# Altium PCB PCB_RelayBoard.PcbDoc
Units mil, origin at the board's own origin, x right, y up, seen from the top; angles counter-clockwise.
Board outline 2559 x 1299.21 mil, 2 copper layers (Top Layer, Bottom Layer); 13 components, 134 nets, 70 pads, 1 vias.
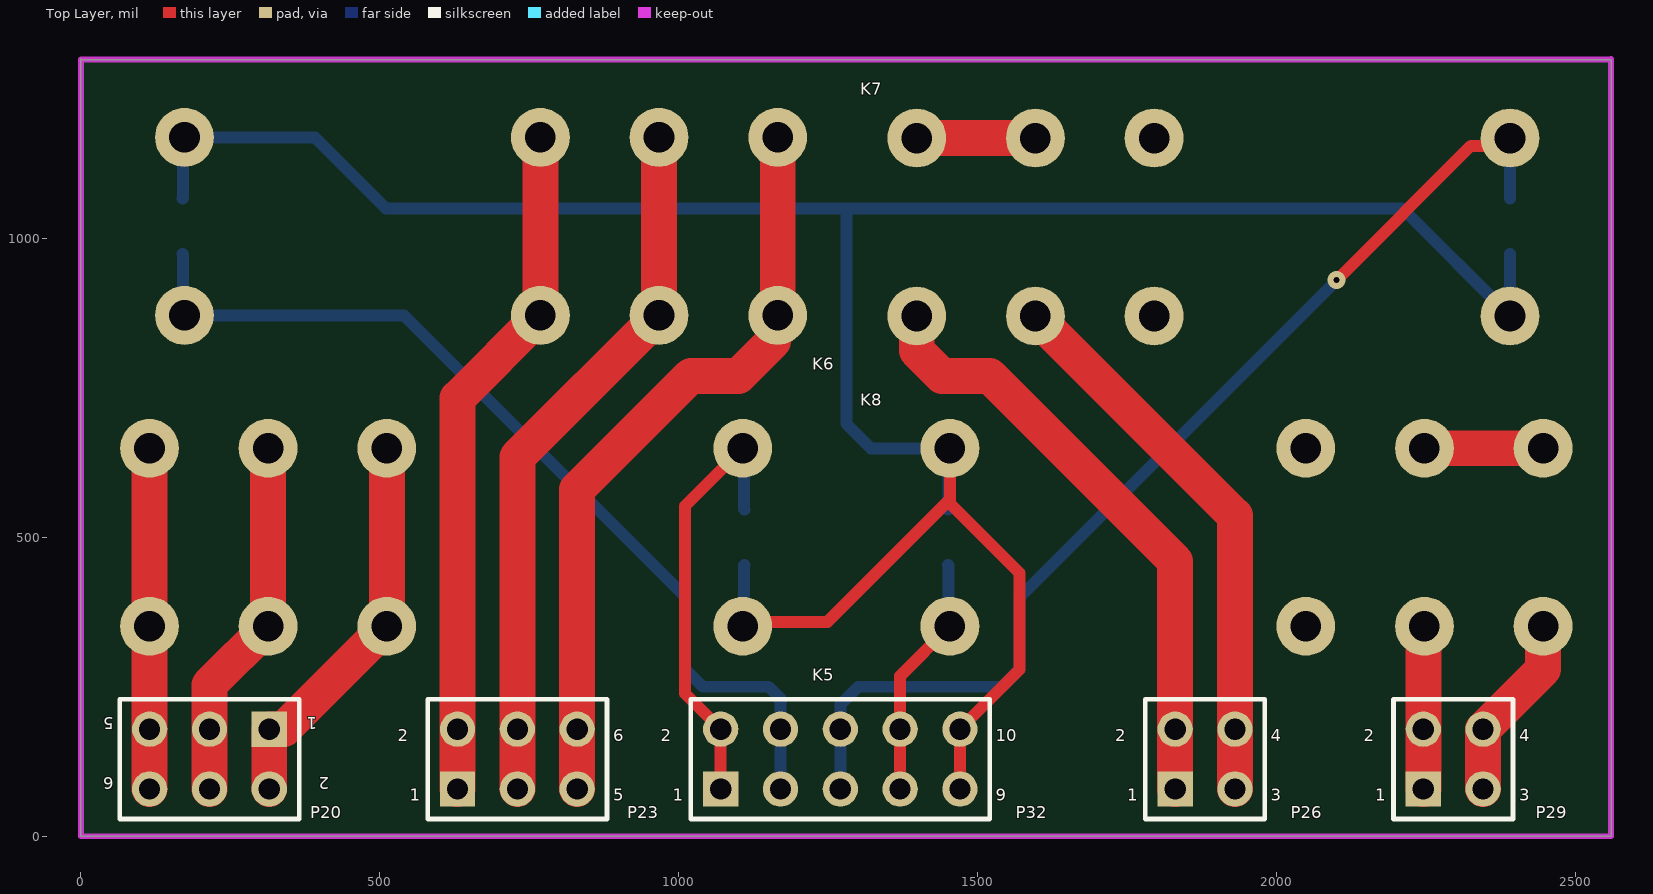
[diagram p0: Top Layer view]
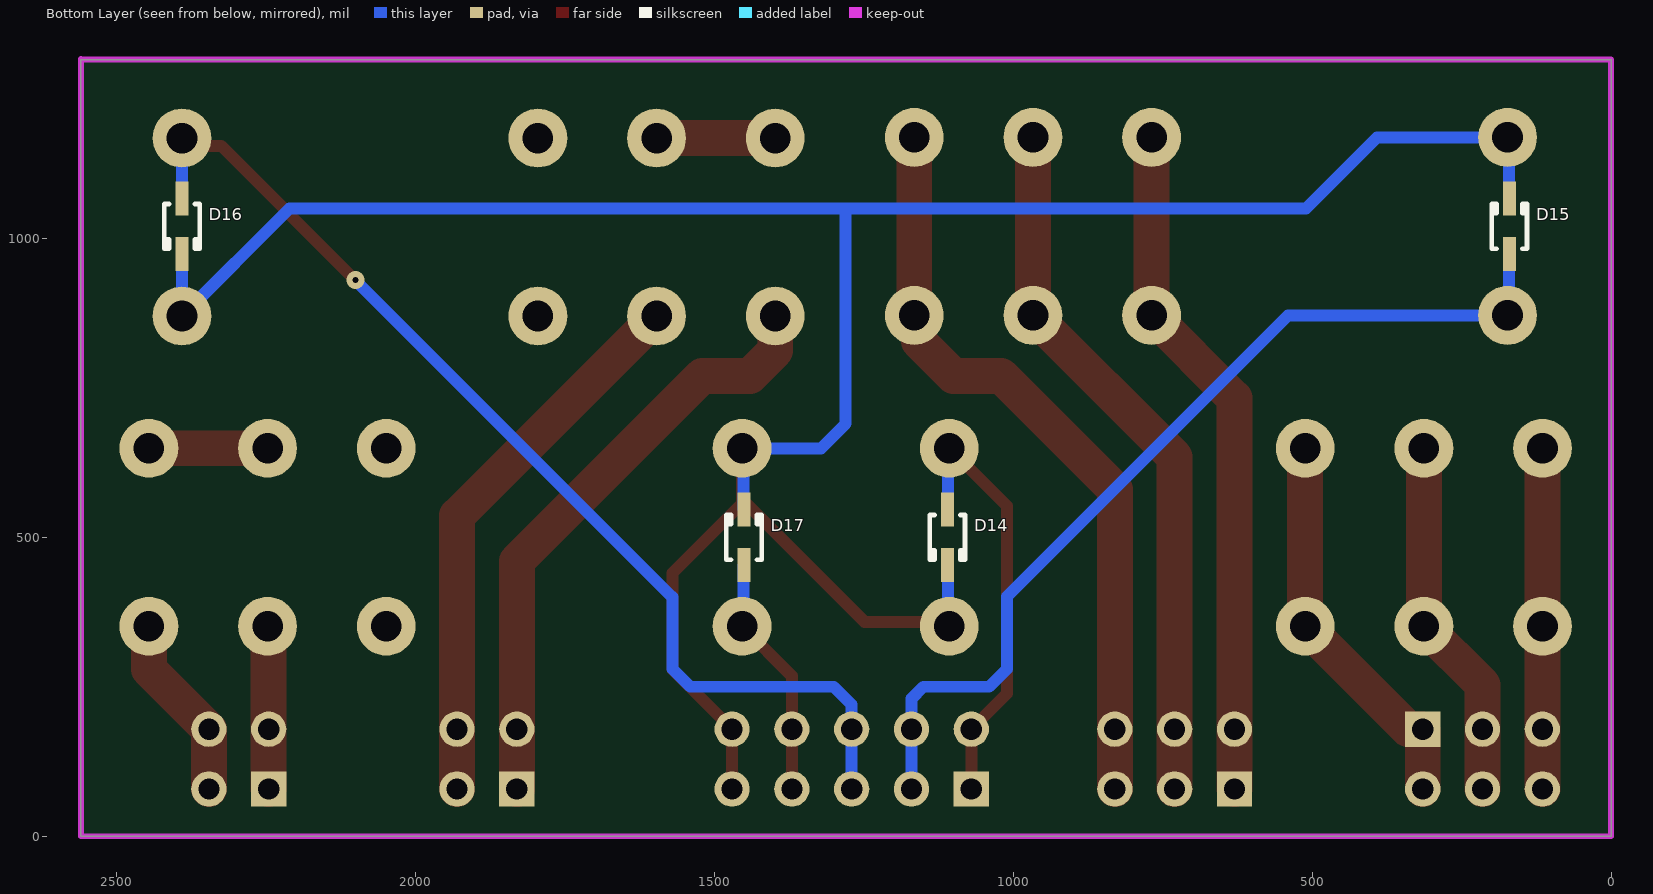
[diagram p1: Bottom Layer view, seen from below]

## Layer stack, top to bottom
Top Solder: solder mask 0.4, Solder Resist, Dk 3.5
Top Layer: signal copper 1.4
Dielectric 1: dielectric 12.6, FR-4, Dk 4.8
Bottom Layer: signal copper 1.4
Bottom Solder: solder mask 0.4, Solder Resist, Dk 3.5

## Board outline
0,0 0,1299.21 0,1299 2559,1299 2559,0

## Design rules (kind name [scope] priority, off if disabled: settings)
BoardOutlineClearance [All] p1: gap=11.81 ignorepadtopadclearanceinfootprint=FALSE except(15.75: Arc-SplitBarrior Arc-SplitContinuation Track-SplitBarrior Track-SplitContinuation SMDPad-SplitBarrior SMDPad-SplitContinuation THPad-SplitBarrior THPad-SplitContinuation Via-SplitBarrior Via-SplitContinuation Fill-SplitBarrior Fill-SplitContinuation Poly-SplitBarrior Poly-SplitContinuation Region-SplitBarrior Region-SplitContinuation Text-SplitBarrior Text-SplitContinuation)
Clearance "Clearance Different Nets" [All] p1: gap=10 ignorepadtopadclearanceinfootprint=FALSE except(3.5: Arc-Arc Arc-Track Arc-SMDPad Track-Track Track-SMDPad; 5: SMDPad-SMDPad SMDPad-Via THPad-Via Via-Via; 7.87: Arc-THPad Arc-Hole Track-THPad Track-Hole SMDPad-THPad SMDPad-Hole THPad-Hole Fill-Hole Poly-Hole Region-Hole Text-Hole; 19.68: THPad-THPad Via-Hole)
Clearance "Clearance Same Nets" [All] p2: gap=10 ignorepadtopadclearanceinfootprint=FALSE except(3.5: Arc-Arc Arc-Track Arc-SMDPad Track-Track Track-SMDPad SMDPad-SMDPad; 5: SMDPad-Via THPad-Via; 7.87: Arc-THPad Arc-Hole Track-THPad Track-Hole SMDPad-THPad SMDPad-Hole THPad-THPad THPad-Hole Via-Hole Fill-Hole Poly-Hole Region-Hole Text-Hole)
Clearance "Clearance Bottom Layer" [OnLayer('Bottom Layer')] p3: gap=10 ignorepadtopadclearanceinfootprint=TRUE except(8: Arc-Arc Arc-Track Arc-SMDPad Arc-THPad Arc-Via Arc-Hole Track-Track Track-SMDPad Track-THPad Track-Via Track-Hole SMDPad-SMDPad SMDPad-THPad SMDPad-Via SMDPad-Hole THPad-THPad THPad-Via THPad-Hole Via-Via Via-Hole Fill-Hole Poly-Hole Region-Hole Text-Hole)
Clearance "Clearance Top Layer" [OnLayer('Top Layer')] p4: gap=10 ignorepadtopadclearanceinfootprint=TRUE except(8: Arc-Arc Arc-Track Arc-SMDPad Arc-THPad Arc-Via Arc-Hole Track-Track Track-SMDPad Track-THPad Track-Via Track-Hole SMDPad-SMDPad SMDPad-THPad SMDPad-Via SMDPad-Hole THPad-THPad THPad-Via THPad-Hole Via-Via Via-Hole Fill-Hole Poly-Hole Region-Hole Text-Hole)
HoleSize [All] p1: absolutevalues=TRUE maxlimit=248.03 minlimit=7.87 maxpercent=80.000 minpercent=20.000
MinimumAnnularRing [All] p1: minimumring=5.12
MinimumSolderMaskSliver [All] p1: minsoldermaskwidth=3.94
PolygonConnect PolygonConnect_1 [All] p1: thpad.connectstyle=Relief thpad.reliefconductorwidth=20 thpad.reliefentries=4 thpad.polygonreliefangle="90 Angle" thpad.airgapwidth=10 smdpad.connectstyle=Relief smdpad.reliefconductorwidth=20 smdpad.reliefentries=4 smdpad.polygonreliefangle="90 Angle" smdpad.airgapwidth=10 via.connectstyle=Direct via.reliefconductorwidth=20 via.reliefentries=4 via.polygonreliefangle="90 Angle" via.airgapwidth=10
RoutingCorners [All] p1: cornerstyle=Round minsetback=100 maxsetback=100
RoutingVias [All] p1: holewidth=19.68 width=39.37 viastyle="Through Hole" minholewidth=7.87 minwidth=13.78 maxholewidth=39.37 maxwidth=78.74
SilkToSilkClearance [All] p1: silktosilkclearance=3.94
SilkToSolderMaskClearance [IsPad] p1: minsilkscreentomaskgap=3.94 clearancetoexposedcopper=TRUE
SolderMaskExpansion [All] p1: expansion=4 istentingtop=FALSE
Width [All] p1: maxlimit=100 minlimit=3.5 preferedwidth=15
25 further rules are at their usual default settings.

## Components (designator, comment, footprint, x,y, rotation, side; value= is the part's Value field where it differs from the comment)
D14 "1N4148" SOD323 1110,500 r270 bottom
D15 "1N4148" SOD323 170,1020 r90 bottom
D16 "1N4148" SOD323 2390,1020 r270 bottom
D17 "1N4148" SOD323 1450,500 r90 bottom
K5 "RPS 8A 24VDC" "RPS 2CO 8A 24V" 710,500 r180 top
K6 "RPS 8A 24VDC" "RPS 2CO 8A 24V" 570,1020 r0 top
K7 "RPS 8A 24VDC" "RPS 2CO 8A 24V" 1993.15,1018.82 r180 top
K8 "RPS 8A 24VDC" "RPS 2CO 8A 24V" 1850,500 r0 top
P20 "Header 3X2" HDR2X3 314.96,179 r180 top locked
P23 "Header 3X2" HDR2X3 629.92,79 r0 top locked
P26 "Header 2X2" HDR2X2 1830,79 r0 top locked
P29 "Header 2X2" HDR2X2 2245,79 r0 top locked
P32 "Header 5X2" HDR2X5 1070,79 r0 top locked

## Footprints (in the part's own frame and the unit in brackets; to place one, negate y for a bottom-side part, rotate by r counter-clockwise, add the part's x,y. Pads: shape width x height; smd on the part's side, far side on the other; paste and mask are expansions set on the pad)
HDR2X2 [mm] "Connector; Header; 2x2 Position"
  rect 1.5x1.5 hole 0.9: 1(0,0)
  round 1.5 hole 0.9: 2(0,2.54) 3(2.54,0) 4(2.54,2.54)
  silkscreen extent -1.27,-1.27 3.81,3.81
HDR2X3 [mm] "Connector; Header; 3x2 Position"
  rect 1.5x1.5 hole 0.9: 1(0,0)
  round 1.5 hole 0.9: 2(0,2.54) 3(2.54,0) 4(2.54,2.54) 5(5.08,0) 6(5.08,2.54)
  silkscreen extent -1.27,-1.27 6.35,3.81
HDR2X5 [mm] "Connector; Header; 5x2 Position"
  rect 1.5x1.5 hole 0.9: 1(0,0)
  round 1.5 hole 0.9: 2(0,2.54) 3(2.54,0) 4(2.54,2.54) 5(5.08,0) 6(5.08,2.54) 7(7.62,0) 8(7.62,2.54) 9(10.16,0) 10(10.16,2.54)
  silkscreen extent -1.27,-1.27 11.43,3.81
"RPS 2CO 8A 24V" [mm] "PCB Relej, 2 CO, 8A, serije RPS, raster 5mm"
  round 2.5 hole 1.3: 11(10.08,3.78) 12(5.04,3.78) 14(15.12,3.78) 21(10.08,-3.78) 22(5.04,-3.78) 24(15.12,-3.78) A1(-10.08,3.78) A2(-10.08,-3.78)
  body extent -12.68,-6.35 16.32,6.35, height 16
SOD323 [mm] "SOD-323/SC-76; 2 Leads; Body 1.7 x 1.3 mm, (LxW)"
  rect 1.45x0.55 smd: 1(1.175,0) 2(-1.175,0)
  silkscreen extent -0.95,-0.75 0.95,0.75

## Part data
D14 D15 D16 D17: library part BAS321, "General-purpose Diode", ComponentLink1Description="Manufacturer Link", ComponentLink1URL=http://www.semiconductors.philips.com/, ComponentLink2Description=Datasheet, ComponentLink2URL=http://www.semiconductors.philips.com/acrobat/datasheets/BAS321_2.pdf, DatasheetVersion=9-Feb-1999, LatestRevisionDate=19-Mar-2004, LatestRevisionNote="Silkscreen size reduced.", PackageDescription="SOD-323/SC-76; 2 Leads; Body 1.7 x 1.3 mm, (LxW)", PackageReference=SOD323, PackageVersion=May-1999, Published=17-Sep-2003, Publisher="Altium Limited"
K5 K6 K7 K8: library part "PCB relay 2CO, 8A, 24VDC, RPS serie 5mm"
P20 P23: "Header, 3-Pin, Dual row", LatestRevisionDate=17-Jul-2002, LatestRevisionNote="Re-released for DXP Platform.", Publisher="Altium Limited"
P26 P29: "Header, 2-Pin, Dual row", LatestRevisionDate=17-Jul-2002, LatestRevisionNote="Re-released for DXP Platform.", Publisher="Altium Limited"
P32: "Header, 5-Pin, Dual row", LatestRevisionDate=17-Jul-2002, LatestRevisionNote="Re-released for DXP Platform.", Publisher="Altium Limited"

## Via types
v1: diameter 30, hole 10, Top Layer to Bottom Layer, 1 vias

## Nets (pads, with @x,y where several pads share a name; then routed paths per layer and width w, separated by ;. In a path a pad name is that pad's centre, name@x,y a point inside that pad or via, vN(x,y) a via of type N, cw(c..) or ccw(c..) an arc to the next point about the centre after c; other vN are vias at no path point)
3V3: 
5V: 
12V: 
24V: 
+24_REL: 
+24_REL2: D14.1 D15.1 D16.1 D17.1 K5.A1 K6.A1 K7.A1 K8.A1 P32.9 P32.10 | length 4399.9
  Top Layer w20: K5.A1 1114.02,358.35 1248.35,358.35 1453.15,563.15 ; K8.A1 1453.15,556.85 1570,440 1570,279 P32.10 P32.9
  Bottom Layer w20: D15.1 170.83,1067.09 170.83,1166.5 K6.A1 391.18,1168.82 510,1050 1280,1050 ; K5.A1 1109.17,353.5 1109.17,452.91 D14.1 ; D17.1 1450.83,547.09 1450.83,646.5 K8.A1 1321.18,648.82 1280,690 1280,1050 ; D16.1 K7.A1 2210,1050 1280,1050
_COM1: 
_COM2: 
_COM3: 
_COM4: 
_COM5: 
_COM6: 
_COM7: 
_COM8: 
_NC1: 
_NC2: 
_NC5: 
_NC6: 
_NO1: 
_NO2: 
_NO3: 
_NO4: 
_NO5: 
_NO6: 
_NO7: 
_NO8: 
_REL1: 
_REL2: 
_REL3: 
_REL4: 
_REL5: 
_REL6: 
_REL7: 
_REL8: 
ADDRESS_0: 
ADDRESS_1: 
ADDRESS_2: 
ADDRESS_3: 
ADDRESS_4: 
ADDRESS_5: 
BUTTON_ON_OFF: 
BUTTON_SELECT: 
COM1: 
COM2: 
COM3: 
COM4: 
COM5: K5.11 K5.21 P20.3 P20.4 | length 610.5
  Top Layer w60: P20.4 P20.3 214.96,252.99 K5.11 K5.21
COM6: K6.11 K6.21 P23.3 P23.4 | length 1188
  Top Layer w60: P23.3 729.92,634.25 K6.21 K6.11
COM7: K7.14 P26.1 P26.2 | length 1016.9
  Top Layer w60: K7.14 1397.87,812.13 1440,770 1520,770 1830,460 P26.2 P26.1
COM8: K8.21 P29.1 P29.2 | length 272.9
  Top Layer w60: P29.1 P29.2 2245,349.33 K8.21
GND: 
I2C1_SCL: 
I2C1_SDA: 
LED_CH1: 
LED_CH2: 
LED_CH3: 
LED_CH4: 
LED_CH5: 
LED_CH6: 
LED_CH7: 
LED_CH8: 
NC1: 
NC2: 
NC5: K5.12 K5.22 P20.1 P20.2 | length 665.6
  Top Layer w60: P20.2 P20.1 339.39,179 K5.12 K5.22
NC6: K6.12 K6.22 P23.1 P23.2 | length 1147.2
  Top Layer w60: P23.1 P23.2 630,179.08 630,732.76 K6.22 K6.12
NetC1_1: 
NetC1_2: 
NetC2_1: 
NetC8_1: 
NetC13_1: 
NetC13_2: 
NetD1_1: 
NetD2_1: 
NetD3_1: 
NetD4_1: 
NetD5_1: 
NetD6_1: 
NetD7_2: 
NetD8_1: 
NetD9_1: 
NetK3_21: 
NetK4_11: 
NetK7_21: K7.21 K7.24 | length 198.4
  Top Layer w60: K7.24 K7.21
NetK8_11: K8.11 K8.14 | length 198.4
  Top Layer w60: K8.11 K8.14
NetP1_3: 
NetP1_4: 
NetP1_5: 
NetP1_6: 
NetP1_7: 
NetP1_8: 
NetP1_9: 
NetP1_10: 
NetP1_11: 
NetP1_12: 
NetP1_13: 
NetP1_14: 
NetP1_15: 
NetP1_17: 
NetP2_1: 
NetP2_2: 
NetR1_1: 
NetR3_2: 
NetR4_2: 
NetR5_2: 
NetR16_1: 
NO1: 
NO2: 
NO3: 
NO4: 
NO5: K5.14 K5.24 P20.5 P20.6 | length 569.9
  Top Layer w60: K5.24 K5.14 114.96,350.94 P20.5 P20.6
NO6: K6.14 K6.24 P23.5 P23.6 | length 1275.6
  Top Layer w60: P23.5 P23.6 829.92,579.92 1020,770 1100,770 1157.92,827.92 1157.92,863.83 K6.24 K6.14
NO7: K7.11 P26.3 P26.4 | length 929.2
  Top Layer w60: K7.11 1930,536.3 P26.4 P26.3
NO8: K8.24 P29.3 P29.4 | length 313.7
  Top Layer w60: P29.3 P29.4 2445.28,279.28 K8.24
REL1: 
REL2: 
REL3: 
REL4: 
REL5: D14.2 K5.A2 P32.1 P32.2 | length 738.7
  Top Layer w20: P32.1 P32.2 1010,239 1010,551.97 K5.A2
  Bottom Layer w20: K5.A2 1109.17,646.5 1109.17,547.09 D14.2
REL6: D15.2 K6.A2 P32.3 P32.4 | length 1588.3
  Bottom Layer w20: D15.2 170.83,972.91 170.83,873.5 K6.A2 540,871.18 1010,401.18 1010,280 1040,250 1150,250 1170,230 P32.4 P32.3
REL7: D16.2 K7.A2 P32.5 P32.6 | length 1825.2
  Top Layer w20: v1(2100,930) 2324.58,1154.58 2376.94,1154.58 K7.A2
  Bottom Layer w20: P32.5 P32.6 1270,220 1300,250 1540,250 1570,280 1570,400 v1(2100,930) ; D16.2 K7.A2
REL8: D17.2 K8.A2 P32.7 P32.8 | length 410.5
  Top Layer w20: P32.7 P32.8 1370,268.03 K8.A2
  Bottom Layer w20: D17.2 1450.83,452.91 1450.83,353.5 K8.A2
RELAY1: 
RELAY2: 
RELAY3: 
RELAY4: 
RELAY5: 
RELAY6: 
RELAY7: 
RELAY8: 
SWCLK: 
SWDIO: 
USART1_DE: 
USART1_RX: 
USART1_TX: 
pads on no net: K7.12 K7.22 K8.12 K8.22

## Keep-outs
Keep-Out Layer:
  lines w10: 0,1299 2559,1299 ; 0,1299.21 0,0 2559,0 2559,1300

## Text inside footprints (layer, text, board x,y; h text height)
P20: Top Overlay "1" at 394.96,199 h20 r180; Top Overlay "2" at 414.96,99 h20 r180; Top Overlay "5" at 54.96,199 h20 r180; Top Overlay "6" at 54.96,99 h20 r180
P23: Top Overlay "1" at 549.92,59 h20; Top Overlay "2" at 529.92,159 h20; Top Overlay "5" at 889.92,59 h20; Top Overlay "6" at 889.92,159 h20
P26: Top Overlay "3" at 1990,59 h20; Top Overlay "4" at 1990,159 h20; Top Overlay "2" at 1730,159 h20; Top Overlay "1" at 1750,59 h20
P29: Top Overlay "3" at 2405,59 h20; Top Overlay "4" at 2405,159 h20; Top Overlay "2" at 2145,159 h20; Top Overlay "1" at 2165,59 h20
P32: Top Overlay "2" at 970,159 h20; Top Overlay "1" at 990,59 h20; Top Overlay "9" at 1530,59 h20; Top Overlay "10" at 1530,159 h20